# Altium PCB BMS PCB.PcbDoc (part 1 of 2)
Units mil, origin at the board's own origin, x right, y up, seen from the top; angles counter-clockwise.
Board outline 2280 x 3625.91 mil, 4 copper layers (TOP, L2, L3, BOTTOM), stack 62.449 mil thick; 104 components, 71 nets, 301 pads, 582 vias.
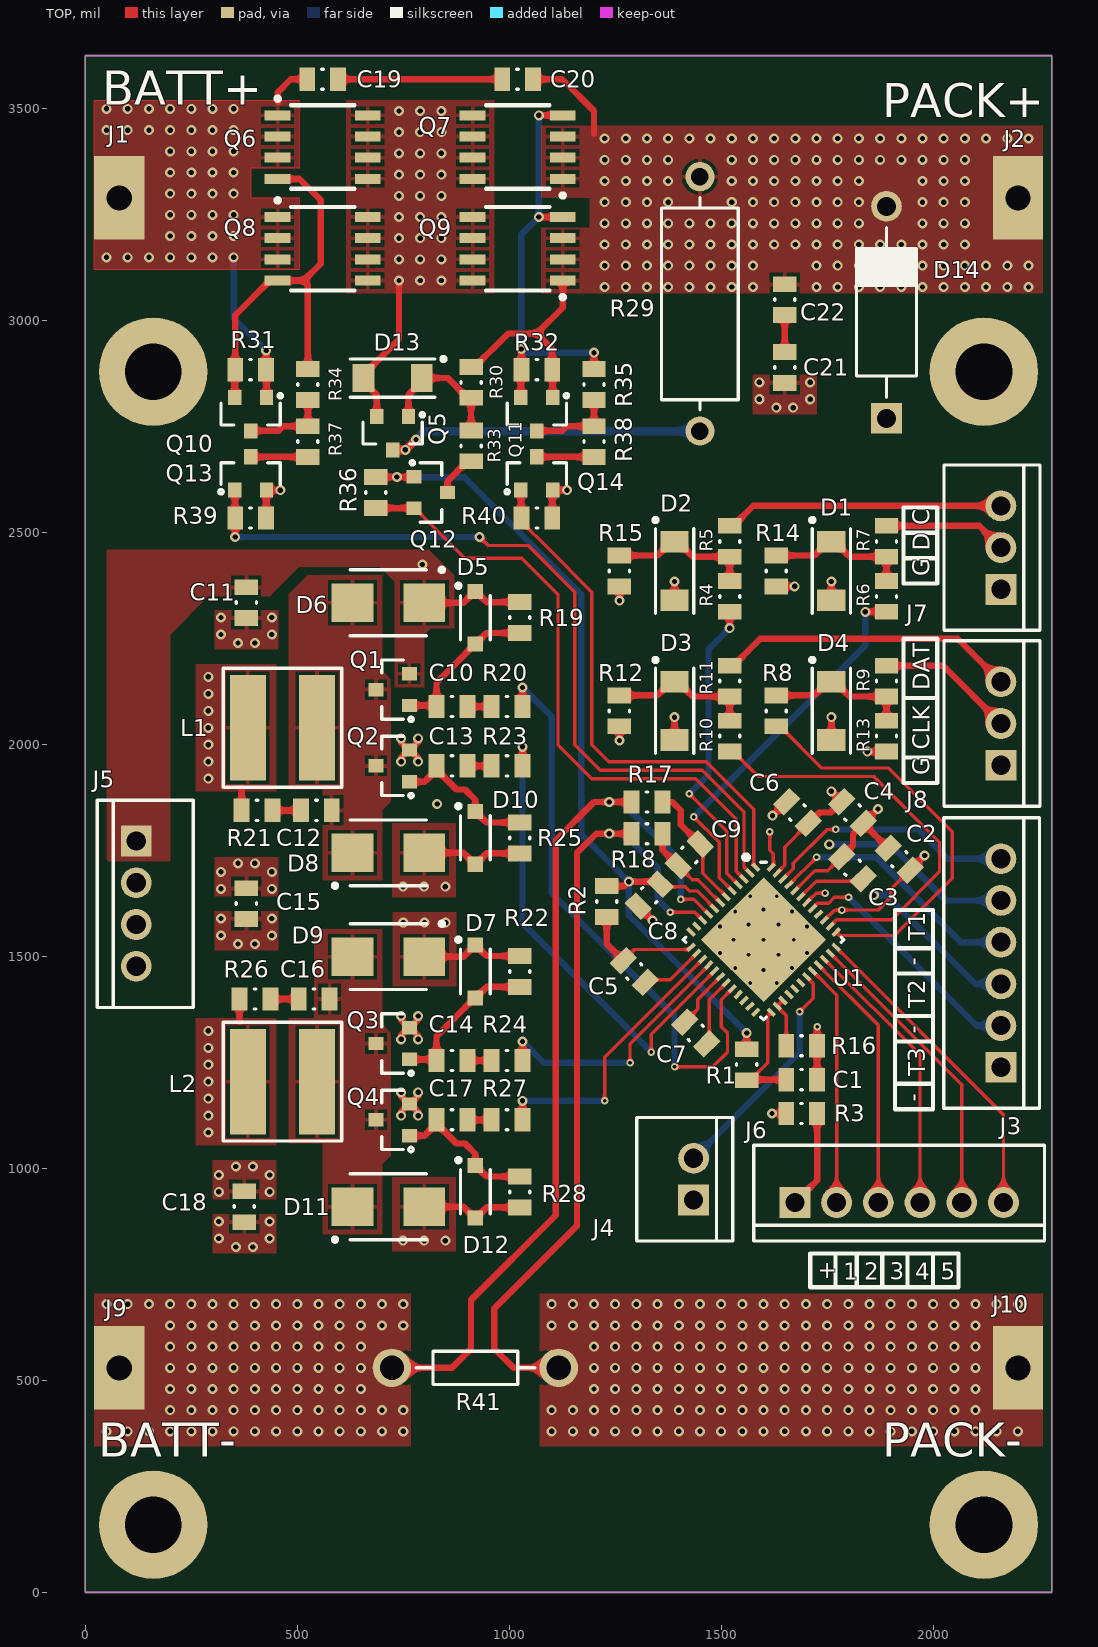
[diagram p0: TOP view]
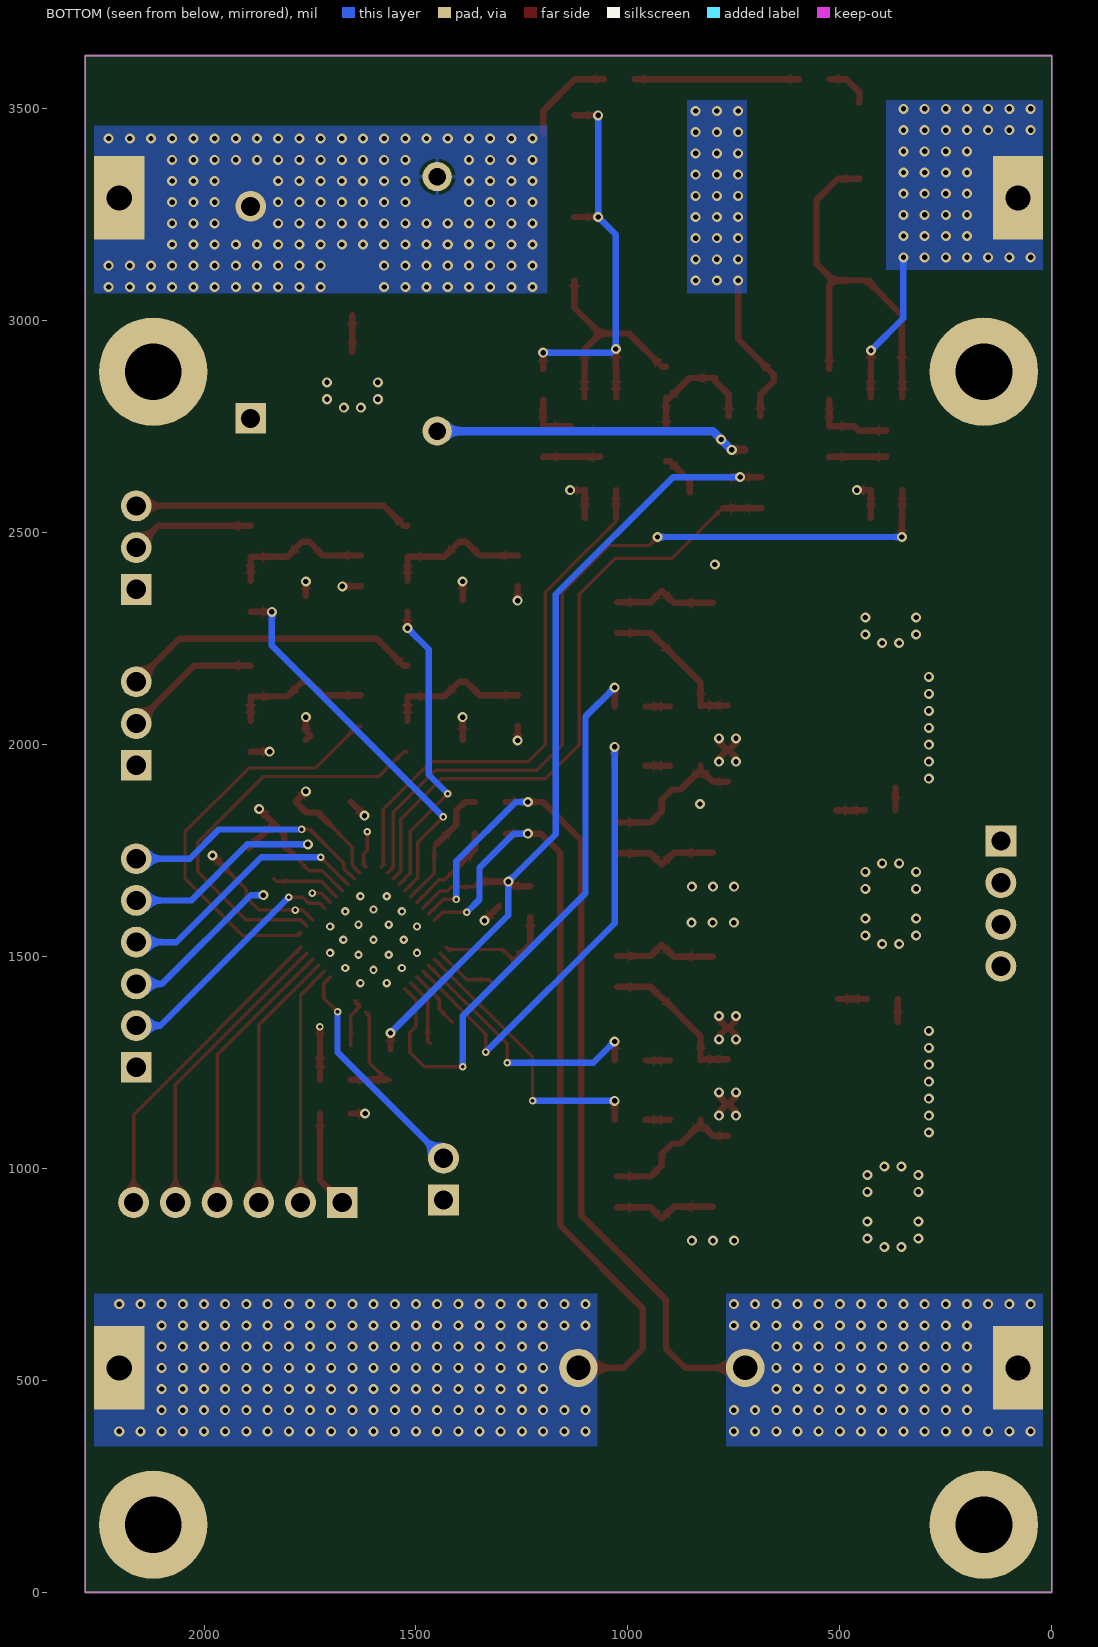
[diagram p1: BOTTOM view, seen from below]
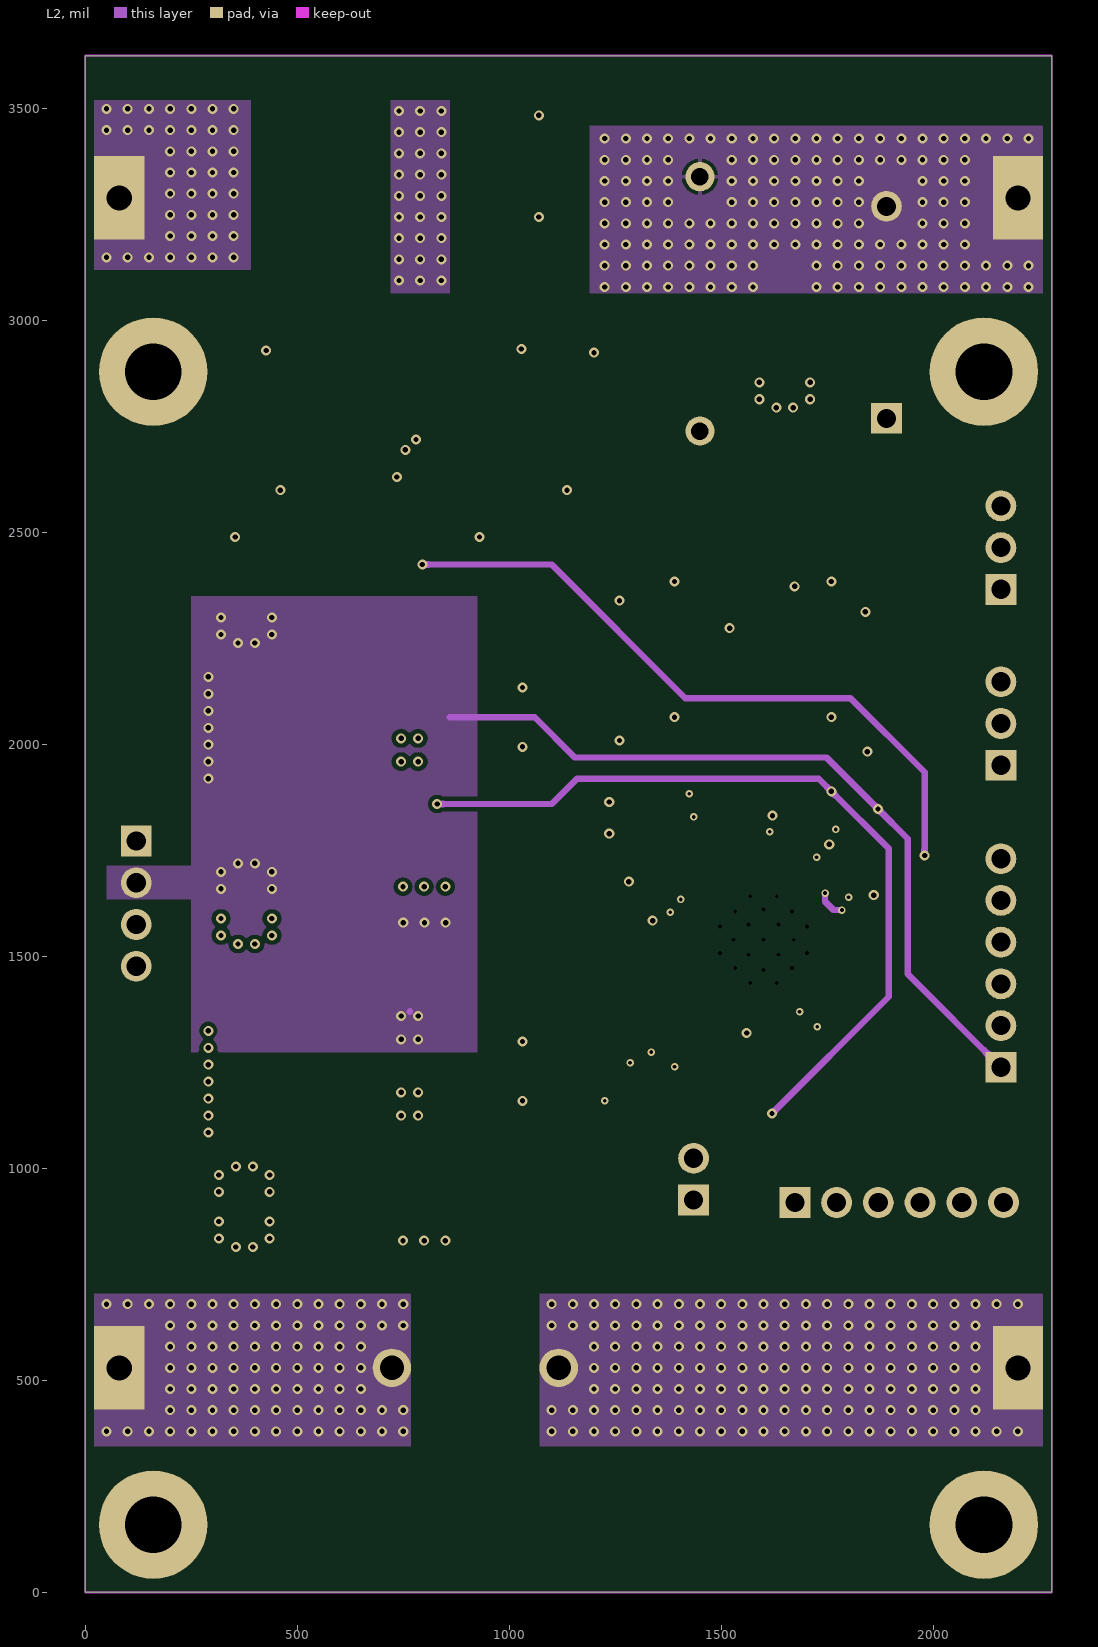
[diagram p2: L2]
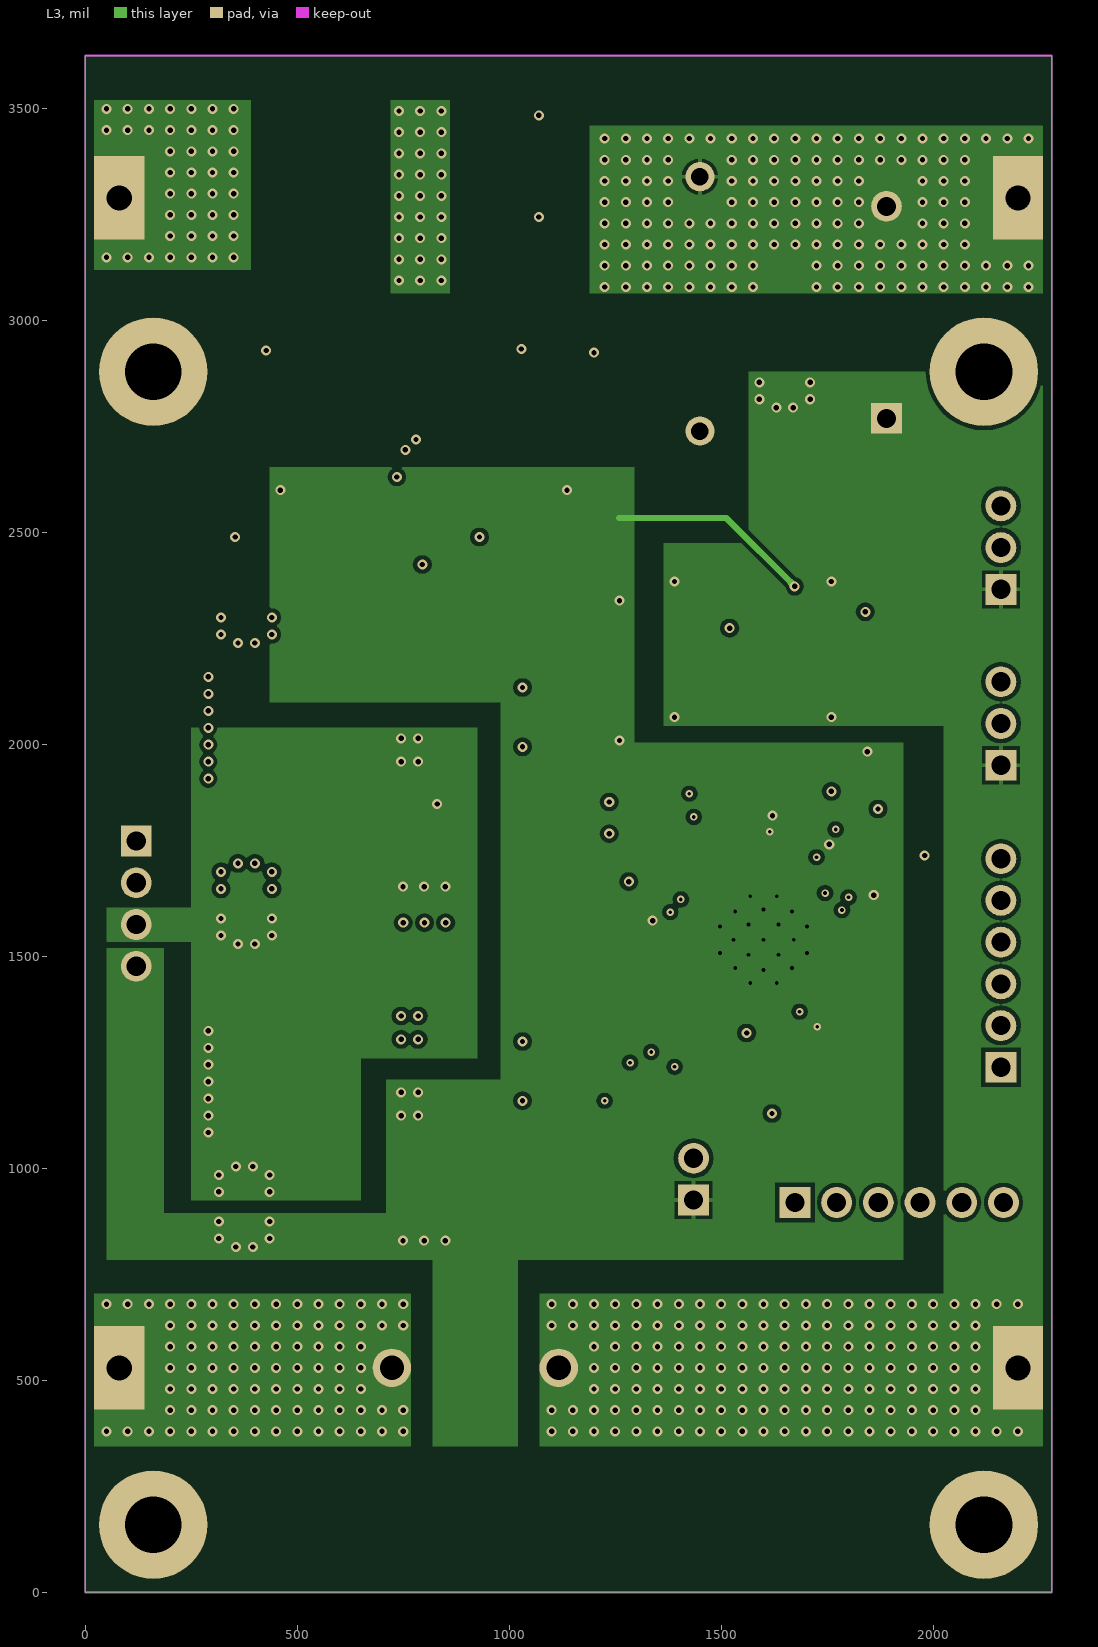
[diagram p3: L3]
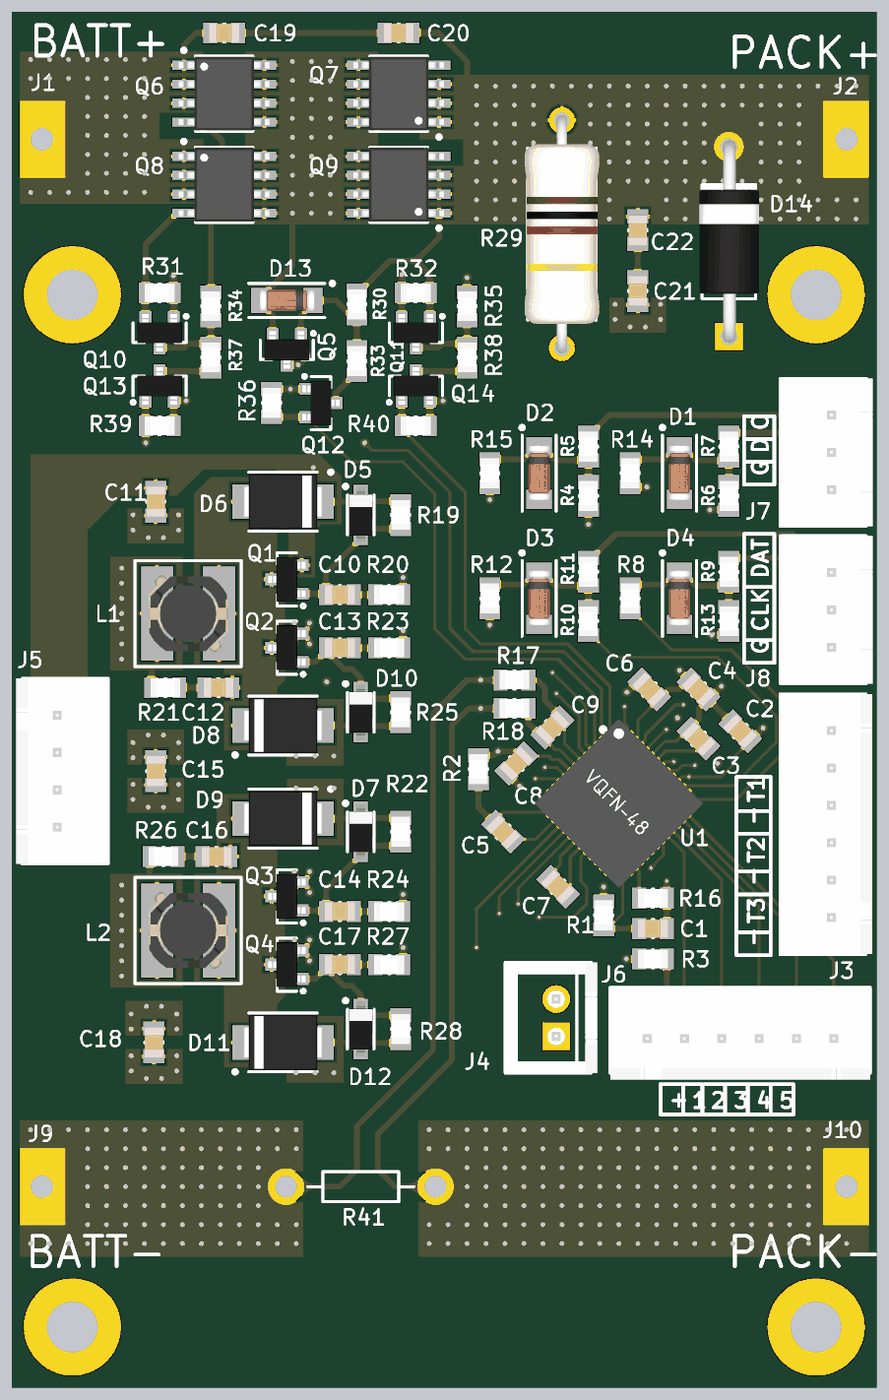
[diagram p4: 3D render of the assembled board from above, using the file's embedded part models]

## Layer stack, top to bottom
Top Solder: solder mask 1, SM-001, Dk 4
TOP: signal copper 1.378
Dielectric 2: prepreg 8.2835, PP-006, Dk 4.1
L2: signal copper 0.5984
Dielectric 1: core 41.9291, Core-043, Dk 4.3
L3: signal copper 0.5984
Dielectric 3: prepreg 8.2835, PP-006, Dk 4.1
BOTTOM: signal copper 1.378
Bottom Solder: solder mask 1, SM-001, Dk 4

## Board outline
0,0 0,3625.91 2280,3625.91 2280,0

## Design rules (kind name [scope] priority, off if disabled: settings)
BoardOutlineClearance [All] p1: gap=11.81 ignorepadtopadclearanceinfootprint=FALSE
Clearance [All] p1: gap=10 ignorepadtopadclearanceinfootprint=FALSE except(0: Arc-Hole Track-Hole SMDPad-Hole THPad-Hole Via-Hole Fill-Hole Poly-Hole Region-Hole Text-Hole; 5: Arc-Arc Arc-Track Track-Track SMDPad-SMDPad; 7.87: Arc-SMDPad Track-SMDPad; 12.99: Arc-THPad Track-THPad; 19.68: THPad-THPad)
HoleSize [All] p1: absolutevalues=TRUE maxlimit=248.03 minlimit=7.87 maxpercent=80.000 minpercent=20.000
MinimumAnnularRing [IsPad] p1: minimumring=11.81
MinimumSolderMaskSliver [All] p1: minsoldermaskwidth=2.76
PlaneConnect [IsPad] p1: planeconnectstyle=Relief reliefexpansion=20 reliefentries=4 reliefconductorwidth=10 reliefairgap=10
PolygonConnect PolygonConnect_Direct [InComponent('J1','J2','J5','J9','J10','R41','D14')] p1: connectstyle=Direct reliefconductorwidth=10 reliefentries=4 polygonreliefangle="90 Angle" airgapwidth=10
PolygonConnect [All] p2: thpad.connectstyle=Relief thpad.reliefconductorwidth=10 thpad.reliefentries=4 thpad.polygonreliefangle="90 Angle" thpad.airgapwidth=8 smdpad.connectstyle=Relief smdpad.reliefconductorwidth=10 smdpad.reliefentries=4 smdpad.polygonreliefangle="90 Angle" smdpad.airgapwidth=8 via.connectstyle=Direct via.reliefconductorwidth=10 via.reliefentries=4 via.polygonreliefangle="90 Angle" via.airgapwidth=8
RoutingVias [All] p1: holewidth=15.75 width=27.56 viastyle="Through Hole" minholewidth=7.87 minwidth=15.75 maxholewidth=19.68 maxwidth=31.5
SilkToSilkClearance [All] p1: silktosilkclearance=0
SilkToSolderMaskClearance [IsPad] p1: minsilkscreentomaskgap=6 clearancetoexposedcopper=TRUE
SolderMaskExpansion SolderMaskExpansion_Vias [IsVia] p1: expansion=4 istentingtop=TRUE
SolderMaskExpansion [All] p2: expansion=2.76 istentingtop=FALSE
UnRoutedNet [All] p1: checkbadconnections=TRUE
Width [All] p1: maxlimit=50 minlimit=5 preferedwidth=10
24 further rules are at their usual default settings.

## Classes and differential pairs
net class BATTVoltage: V1 V2 V3
net class FETControl: CHG DSG PRE
net class PUMPSignal: P1N P2N P2S P3S
component class Page3: C19 C20 C21 C22 D13 D14 Q5 Q6 Q7 Q8 Q9 Q10 Q11 Q12 Q13 Q14 R29 R30 R31 R32 R33 R34 R35 R36 R37 R38 R39 R40
component class Page2: C1 C2 C3 C4 C5 C6 C7 C8 C9 D1 D2 D3 D4 R1 R2 R3 R4 R5 R6 R7 R8 R9 R10 R11 R12 R13 R14 R15 R16 R17 R18
component class Page4: C10 C11 C12 C13 C14 C15 C16 C17 C18 D5 D6 D7 D8 D9 D10 D11 D12 L1 L2 Q1 Q2 Q3 Q4 R19 R20 R21 R22 R23 R24 R25 R26 R27 R28
component class "BMS Schematic": J1 J2 J3 J4 J5 J6 J7 J8 J9 J10 R41

## Components (designator, comment, footprint, x,y, rotation, side; value= is the part's Value field where it differs from the comment)
C1 "1uF" C0805 1690,1210 r0 top
C2 "10uF" C0805 1920,1730 r135 top
C3 "10uF" C0805 1810,1710 r135 top
C4 "10uF" C0805 1810,1840 r135 top
C5 "1000pF" C0805 1295,1465 r135 top
C6 "10uF" C0805 1680,1840 r135 top
C7 "1000pF" C0805 1440,1320 r315 top
C8 "10uF" C0805 1330,1645 r225 top
C9 "0.01uF" C0805 1425,1740 r225 top
C10 "3300pF" C0805 865,2090 r180 top
C11 "10uF" C0805 380,2335 r270 top
C12 "0.01uF" C0805 545,1845 r180 top
C13 "3300pF" C0805 865,1950 r180 top
C14 "3300pF" C0805 865,1255 r0 top
C15 "10uF" C0805 380,1625 r270 top
C16 "0.01uF" C0805 540,1400 r0 top
C17 "3300pF" C0805 865,1115 r0 top
C18 "10uF" C0805 375,910 r270 top
C19 "0.1uF" C0805 560,3570 r0 top
C20 "0.1uF" C0805 1020,3570 r0 top
C21 "0.1uF" C0805 1650,2890 r270 top
C22 "0.1uF" C0805 1650,3050 r270 top
D1 "5V6" MINIMELF 1760,2410 r90 top
D2 "5V6" MINIMELF 1390,2410 r90 top
D3 "5V6" MINIMELF 1390,2080 r90 top
D4 "5V6" MINIMELF 1760,2080 r90 top
D5 "1N5819" SOD123 920,2300 r90 top
D6 "SS34" DO-214AA-SMB 715,2335 r0 top
D7 "1N5819" SOD123 920,1465 r90 top
D8 "SS34" DO-214AA-SMB 715,1745 r180 top
D9 "SS34" DO-214AA-SMB 715,1500 r0 top
D10 "1N5819" SOD123 920,1780 r90 top
D11 "SS34" DO-214AA-SMB 715,910 r180 top
D12 "1N5819" SOD123 920,945 r90 top
D13 "5V6" MINIMELF 725,2865 r0 top
D14 "P6KE18A" DO-15 1890,3020 r90 top
J1 "PAD 5X3MM" "PAD 5X3MM" 80,3290 r90 top locked
J2 "PAD 5X3MM" "PAD 5X3MM" 2200,3290 r90 top locked
J3 "CON XH 6P" "XH 2.5 6P" 2160,1485 r270 top locked
J4 "CON XH 2P" "XH 2.5 2P" 1435,975 r270 top locked
J5 "CON XH 4P" "XH 2.5 4P" 120,1625 r90 top locked
J6 "CON XH 6P" "XH 2.5 6P" 1920,920 r180 top locked
J7 "CON XH 3P" "XH 2.5 3P" 2160,2465 r270 top locked
J8 "CON XH 3P" "XH 2.5 3P" 2160,2050 r270 top locked
J9 "PAD 5X3MM" "PAD 5X3MM" 80,530 r270 top locked
J10 "PAD 5X3MM" "PAD 5X3MM" 2200,530 r270 top locked
L1 "6.8uH" CDRH5D28R 465,2040 r180 top
L2 "6.8uH" CDRH5D28R 465,1205 r0 top
Q1 "AO3401" SOT-23 725,2130 r90 top
Q2 "AO3400" SOT-23 725,1950 r90 top
Q3 "AO3401" SOT-23 725,1295 r90 top
Q4 "AO3400" SOT-23 725,1115 r90 top
Q5 "AO3400" SOT-23 725,2735 r180 top
Q6 "AO4407" SOIC-8 560,3410 r0 top locked
Q7 "AO4407" SOIC-8 1020,3410 r180 top locked
Q8 "AO4407" SOIC-8 560,3170 r0 top locked
Q9 "AO4407" SOIC-8 1020,3170 r180 top locked
Q10 "MMBF4393L" SOT-23 390,2780 r180 top
Q11 "MMBF4393L" SOT-23 1065,2780 r180 top
Q12 "AO3400" SOT-23 815,2595 r270 top
Q13 "AO3400" SOT-23 390,2640 r0 top
Q14 "AO3400" SOT-23 1065,2640 r0 top
R1 "10K" R0805 1560,1245 r90 top
R2 "100K" R0805 1230,1630 r90 top
R3 "100" R0805 1690,1130 r0 top
R4 "100" R0805 1520,2350 r90 top
R5 "100" R0805 1520,2480 r90 top
R6 "100" R0805 1890,2350 r90 top
R7 "100" R0805 1890,2480 r90 top
R8 "100" R0805 1630,2080 r90 top
R9 "100" R0805 1890,2150 r90 top
R10 "100" R0805 1520,2020 r90 top
R11 "100" R0805 1520,2150 r90 top
R12 "1M" R0805 1260,2080 r90 top
R13 "1M" R0805 1890,2020 r90 top
R14 "1M" R0805 1630,2410 r90 top
R15 "1M" R0805 1260,2410 r90 top
R16 "1M" R0805 1690,1290 r180 top
R17 "4K7" R0805 1325,1865 r0 top
R18 "4K7" R0805 1325,1790 r0 top
R19 "22K" R0805 1025,2300 r90 top
R20 "120" R0805 995,2090 r180 top
R21 "120" R0805 405,1845 r180 top
R22 "22K" R0805 1025,1465 r90 top
R23 "120" R0805 995,1950 r180 top
R24 "120" R0805 995,1255 r0 top
R25 "22K" R0805 1025,1780 r90 top
R26 "120" R0805 400,1400 r0 top
R27 "120" R0805 995,1115 r0 top
R28 "22K" R0805 1025,945 r90 top
R29 "120" "RES TH 1W" 1450,3040 r90 top
R30 "1M" R0805 910,2855 r90 top
R31 "680K" R0805 390,2885 r0 top
R32 "680K" R0805 1065,2885 r180 top
R33 "680K" R0805 910,2705 r90 top
R34 "270K" R0805 525,2850 r90 top
R35 "270K" R0805 1200,2850 r90 top
R36 "1M" R0805 685,2595 r90 top
R37 "220K" R0805 525,2715 r90 top
R38 "220K" R0805 1200,2715 r90 top
R39 "1M" R0805 390,2535 r180 top
R40 "1M" R0805 1065,2535 r180 top
R41 "0.01" RSHUNT 920,530 r0 top locked
U1 "BQ78PL116" VQFN-48 1600,1540 r315 top locked

## Footprints (in the part's own frame and the unit in brackets; to place one, negate y for a bottom-side part, rotate by r counter-clockwise, add the part's x,y. Pads: shape width x height; smd on the part's side, far side on the other; paste and mask are expansions set on the pad)
C0805 [mm]
  rect 0.95x1.4 smd: 1(-0.925,0) 2(0.925,0)
  silkscreen extent -0.05,-0.6 0.05,0.6, body extent -1,-0.62 1,0.62, height 0.61
CDRH5D28R [mm]
  rect 2.15x6.3 smd: 1(-2.075,0) 2(2.075,0)
  silkscreen extent -3.56,-3.56 3.56,3.56, body extent -2.65,-2.58 2.65,2.6, height 2.81
DO-15 [mil]
  rect 72.4x72.4 hole 44.84: 1(-250,0)
  round 72.4 hole 44.84: 2(250,0)
  silkscreen extent -200,-71 200,71, body extent -267,-80 267,77, height 161
DO-214AA-SMB [mm]
  rect 2.5x2.3 smd: 1(-2.15,0) 2(2.15,0)
  silkscreen extent -2.29,-1.97 3.33,2.09, body extent -2.65,-1.85 2.65,1.85, height 2.26
MINIMELF [mm]
  rect 1.3x1.7 smd: 1(-1.75,0) 2(1.75,0)
  silkscreen extent -2.54,-1.14 3.17,1.27, body extent -1.82,-0.8 1.88,0.8, height 1.6
"PAD 5X3MM" [mm]
  rect 5x3 hole 1.5: 1(0,0)
R0805 [mm]
  rect 0.95x1.4 smd: 1(-0.925,0) 2(0.925,0)
  silkscreen extent -0.05,-0.6 0.05,0.6, body extent -1,-0.62 1,0.63, height 0.61
"RES TH 1W" [mm]
  round 1.75 hole 1.05: 1(-7.62,0) 2(7.62,0)
  silkscreen extent -6.35,-2.3 6.35,2.3, body extent -7.97,-2.5 7.97,2.5, height 5
RSHUNT [mm]
  round 2.3 hole 1.45: 1(-5,0) 2(5,0)
  silkscreen extent -3.56,-1 3.56,1
SOD123 [mm] "SODFL, 2-Leads, Body 1,55x3,70mm, IPC Medium Density"
  rect 0.9x0.95 smd: 1(-1.575,0) 2(1.575,0)
  silkscreen extent -1.33,-0.89 2.03,1.14, body extent -1.85,-0.8 1.85,0.8, height 1.28
SOIC-8 [mm]
  rect 1.55x0.6 smd: 1(-2.7,1.905) 2(-2.7,0.635) 3(-2.7,-0.635) 4(-2.7,-1.905) 5(2.7,-1.905) 6(2.7,-0.635) 7(2.7,0.635) 8(2.7,1.905)
  silkscreen extent -2.82,-2.5 1.91,3.02, body extent -3.03,-2.48 3.03,2.47, height 1.74
SOT-23 [mm]
  rect 0.8x0.9 smd: 1(-0.95,-1) 2(0.95,-1) 3(0,1)
  silkscreen extent -1.9,-1.23 1.78,0.65, body extent -1.5,-1.25 1.5,1.25, height 1.01
VQFN-48 [mm]
  rect 0.6x0.24 smd: 1(-3.4,2.75) 2(-3.4,2.25) 3(-3.4,1.75) 4(-3.4,1.25) 5(-3.4,0.75) 6(-3.4,0.25) 7(-3.4,-0.25) 8(-3.4,-0.75) 9(-3.4,-1.25) 10(-3.4,-1.75) 11(-3.4,-2.25) 12(-3.4,-2.75) 25(3.4,-2.75) 26(3.4,-2.25) 27(3.4,-1.75) 28(3.4,-1.25) 29(3.4,-0.75) 30(3.4,-0.25) 31(3.4,0.25) 32(3.4,0.75) 33(3.4,1.25) 34(3.4,1.75) 35(3.4,2.25) 36(3.4,2.75)
  rect 0.24x0.6 smd: 13(-2.75,-3.4) 14(-2.25,-3.4) 15(-1.75,-3.4) 16(-1.25,-3.4) 17(-0.75,-3.4) 18(-0.25,-3.4) 19(0.25,-3.4) 20(0.75,-3.4) 21(1.25,-3.4) 22(1.75,-3.4) 23(2.25,-3.4) 24(2.75,-3.4) 37(2.75,3.4) 38(2.25,3.4) 39(1.75,3.4) 40(1.25,3.4) 41(0.75,3.4) 42(0.25,3.4) 43(-0.25,3.4) 44(-0.75,3.4) 45(-1.25,3.4) 46(-1.75,3.4) 47(-2.25,3.4) 48(-2.75,3.4)
  rect 5.3x5.3 smd paste-2.65: 49(0,0)
  silkscreen extent -4.38,-3.4 3.4,3.4, body extent -4.05,-4.05 4.05,4.05, height 0.8
"XH 2.5 2P" [mm]
  rect 1.85x1.85 hole 1.15: 1(1.25,0)
  round 1.85 hole 1.15: 2(-1.25,0)
  silkscreen extent -3.7,-3.41 3.7,2.34, body extent -3.7,-3.36 3.7,2.74, height 2.9
"XH 2.5 3P" [mm]
  rect 1.85x1.85 hole 1.15: 1(2.5,0)
  round 1.85 hole 1.15: 2(0,0) 3(-2.5,0)
  silkscreen extent -4.95,-3.41 4.95,2.34, body extent -4.95,-3.33 4.95,2.77, height 7.01
"XH 2.5 4P" [mm]
  rect 1.85x1.85 hole 1.15: 1(3.75,0)
  round 1.85 hole 1.15: 2(1.25,0) 3(-1.25,0) 4(-3.75,0)
  silkscreen extent -6.22,-3.41 6.2,2.34, body extent -6.2,-3.36 6.2,2.74, height 7.01
"XH 2.5 6P" [mm]
  rect 1.85x1.85 hole 1.15: 1(6.25,0)
  round 1.85 hole 1.15: 2(3.75,0) 3(1.25,0) 4(-1.25,0) 5(-3.75,0) 6(-6.25,0)
  silkscreen extent -8.71,-3.43 8.71,2.31, body extent -8.71,-3.35 8.69,2.75, height 7.01

## Part data
C1: library part "CAP 0805 1uF", "0805 C 1uF Ceramic Multilayer Capacitor; 50 V; +125degC; X7R Dielectric; +/-10%", Case Code (Imperial)=0805, Case Code (Metric)=2012, Dielectric=X7R, Dielectric Material=Ceramic, Manufacturer=KEMET, Manufacturer Part Number=C0805C105K5RACTU, Max Operating Temperature=125°C, Min Operating Temperature=-55°C, Package Quantity=1, Tolerance=10%, Voltage=50V, Capacitance=1uF, Case/Package=0805, Category="Ceramic Capacitors", ComponentLink1Description=https://datasheet.ciiva.com/7842/1732744-7842192.pdf?src-supplier=Element14, ComponentLink1URL=https://datasheet.ciiva.com/7842/1732744-7842192.pdf?src-supplier=Element14, ComponentLink2Description=https://datasheet.ciiva.com/5408/kem-c1002-x7r-smd-5408569.pdf?src-supplier=Mouser, ComponentLink2URL=https://datasheet.ciiva.com/5408/kem-c1002-x7r-smd-5408569.pdf?src-supplier=Mouser, ComponentLink3Description=https://datasheet.ciiva.com/22700/1851736-22700523.pdf?src-supplier=Element14, ComponentLink3URL=https://datasheet.ciiva.com/22700/1851736-22700523.pdf?src-supplier=Element14, Construction=Flat, Contact Plating=Tin,Matte, Depth=1.25mm, Height=1.25mm, Length=2mm, Mount="Surface Mount,PCB", Packaging="Tape and Reel", Pricing 1="2500=0,25080, 10000=0,22150 (USD)", REACH SVHC="No SVHC", RoHS=Yes, RoHS Compliant=Yes, Series=C, Stock 1=317103, Supplier 1="Arrow Electronics", Supplier Part Number 1=C0805C105K5RACTU, Termination=SMD/SMT, Thickness=0.055inch, Voltage Rating=50V, Voltage Rating (DC)=50V, Width=0.049inch
C2 C3 C4 C6 C8 C11 C15 C18: library part "CAP 0805 10uF", "Cap Ceramic 10uF 10V X5R 10% SMD 0805 85C Plastic T/R", Case Code (Imperial)=0805, Case Code (Metric)=2012, Dielectric=X5R, Manufacturer=KEMET, Manufacturer Part Number=C0805L106K8PACTU, Max Operating Temperature=85°C, Min Operating Temperature=-55°C, Package Quantity=4000, Supplier Part Number 1=80-C0805L106K8P, Tolerance=10%, Voltage Rating=10V, Capacitance=10uF, Case/Package=0805, Category="Ceramic Capacitors", ComponentLink1Description=https://datasheet.ciiva.com/23928/1751297-23928886.pdf?src-supplier=Newark, ComponentLink1URL=https://datasheet.ciiva.com/23928/1751297-23928886.pdf?src-supplier=Newark, ComponentLink2Description=https://datasheet.ciiva.com/232/mlcclowprofile-232272.pdf?src-supplier=Digi-Key, ComponentLink2URL=https://datasheet.ciiva.com/232/mlcclowprofile-232272.pdf?src-supplier=Digi-Key, ComponentLink3Description=https://datasheet.ciiva.com/193/mlcclowprofile-193796.pdf?src-supplier=Digi-Key, ComponentLink3URL=https://datasheet.ciiva.com/193/mlcclowprofile-193796.pdf?src-supplier=Digi-Key, ComponentLink4Description=https://datasheet.ciiva.com/232/mlcclowprofile-232271.pdf?src-supplier=Digi-Key, ComponentLink4URL=https://datasheet.ciiva.com/232/mlcclowprofile-232271.pdf?src-supplier=Digi-Key, Depth=1.25mm, Length=0.079inch, Mount="Surface Mount", Packaging="Tape and Reel", Pricing 1="1=0,73000, 10=0,54000, 50=0,54000, 100=0,37000, 1000=0,24700, 10000=0,21500 (USD)", REACH SVHC="No SVHC", RoHS=Yes, RoHS Compliant=Yes, Series=C, Stock 1=15642, Supplier 1=Mouser, Termination=SMD/SMT, Thickness=0.037inch, Voltage Rating (DC)=10V, Width=0.049inch
C5 C7: library part "CAP 0805 1000pF", "Cap Ceramic 0.001uF 50V X7R 10% SMD 0805 125C Plastic T/R", Capacitance=1nF, Case Code (Imperial)=0805, Case Code (Metric)=2012, Dielectric=X7R, Dielectric Material=Ceramic, Manufacturer=KEMET, Manufacturer Part Number=C0805C102K5RACTU, Max Operating Temperature=125°C, Min Operating Temperature=-55°C, Package Quantity=4000, Tolerance=10%, Voltage=50V, Case/Package=0805, Category="Ceramic Capacitors", ComponentLink1Description=https://datasheet.ciiva.com/7842/1918693-7842527.pdf?src-supplier=Element14, ComponentLink1URL=https://datasheet.ciiva.com/7842/1918693-7842527.pdf?src-supplier=Element14, ComponentLink2Description=https://datasheet.ciiva.com/18193/getdatasheetpartid-385640-18193338.pdf?src-supplier=Verical, ComponentLink2URL=https://datasheet.ciiva.com/18193/getdatasheetpartid-385640-18193338.pdf?src-supplier=Verical, ComponentLink3Description=https://datasheet.ciiva.com/39122/docfinderpartnumberc0402c102k5ractu-39122922.pdf?src-supplier=Onlinecomponents.com, ComponentLink3URL=https://datasheet.ciiva.com/39122/docfinderpartnumberc0402c102k5ractu-39122922.pdf?src-supplier=Onlinecomponents.com, Construction=Flat, Contact Plating=Tin,Matte, Depth=1.25mm, Height=0.78mm, Lead Pitch=0.75mm, Length=2mm, Mount="Surface Mount,PCB", Number of Pins=2, Packaging="Tape and Reel", Pricing 1="4000=0,03830 (USD)", Radiation Hardening=No, REACH SVHC="No SVHC", RoHS=Yes, RoHS Compliant=Yes, Series="SMD Comm X7R", Stock 1=255800, Supplier 1="Arrow Electronics", Supplier Part Number 1=C0805C102K5RACTU, Termination=SMD/SMT, Voltage Rating=50V, Voltage Rating (DC)=50V, Width=1.25mm
C9 C12 C16: library part "CAP 0805 0.01uF", "Cap Ceramic 0.01uF 16V X7R 10% SMD 0805 125°C Paper T/R", Capacitance=10nF, Case Code (Imperial)=0805, Case Code (Metric)=2012, Dielectric=X7R, Dielectric Material=Ceramic, Manufacturer=KEMET, Manufacturer Part Number=C0805C103K4RACTU, Max Operating Temperature=125°C, Min Operating Temperature=-55°C, Package Quantity=1, Tolerance=10%, Voltage Rating=16V, Case/Package=0805, Category="Ceramic Capacitors", ComponentLink1Description=http://www.farnell.com/datasheets/2746090.pdf?src-supplier=Farnell, ComponentLink1URL=http://www.farnell.com/datasheets/2746090.pdf?src-supplier=Farnell, ComponentLink2Description=http://www.mouser.com/ds/2/212/KEM_C1002_X7R_SMD-1102033.pdf?src-supplier=Mouser, ComponentLink2URL=http://www.mouser.com/ds/2/212/KEM_C1002_X7R_SMD-1102033.pdf?src-supplier=Mouser, ComponentLink3Description=https://api.kemet.com/component-edge/download/datasheet/C0805C103K4RACTU.pdf?src-supplier=Digi-Key, ComponentLink3URL=https://api.kemet.com/component-edge/download/datasheet/C0805C103K4RACTU.pdf?src-supplier=Digi-Key, ComponentLink4Description=http://www.farnell.com/datasheets/1791936.pdf?src-supplier=Newark, ComponentLink4URL=http://www.farnell.com/datasheets/1791936.pdf?src-supplier=Newark, ComponentLink5Description=http://www.farnell.com/datasheets/2746090.pdf?src-supplier=Newark, ComponentLink5URL=http://www.farnell.com/datasheets/2746090.pdf?src-supplier=Newark, ComponentLink6Description=http://www.farnell.com/datasheets/2064983.pdf?src-supplier=Element14, ComponentLink6URL=http://www.farnell.com/datasheets/2064983.pdf?src-supplier=Element14, ComponentLink7Description=http://components.arrow.com/part/dataview/3450723S5469568N7429?src-supplier=Arrow+Electronics, ComponentLink7URL=http://components.arrow.com/part/dataview/3450723S5469568N7429?src-supplier=Arrow+Electronics, Depth=1.25mm, Height=0.78mm, Lead Pitch=0.75mm, Length=2mm, Mount="Surface Mount", Packaging="Tape and Reel", Pricing 1="4000=0,07000, 8000=0,06640, 12000=0,06580, 20000=0,06310, 24000=0,05650, 100000=0,04830 (USD)", Radiation Hardening=No, REACH SVHC="No SVHC", RoHS=Yes, Stock 1=24000, Supplier 1="Arrow Electronics", Supplier Part Number 1=C0805C103K4RACTU, Termination=SMD/SMT, Thickness=0.035inch, Voltage Rating (DC)=16V, Width=0.049inch
C10 C13 C14 C17: library part "CAP 0805 3300pF", "Cap Ceramic 0.0033uF 50V X7R 10% SMD 0805 125C Paper T/R", Capacitance=3.3nF, Case Code (Imperial)=0805, Case Code (Metric)=2012, Dielectric=X7R, Dielectric Material=Ceramic, Manufacturer=KEMET, Manufacturer Part Number=C0805C332K5RACTU, Max Operating Temperature=125°C, Min Operating Temperature=-55°C, Package Quantity=1, Tolerance=10%, Voltage=50V, Case/Package=0805, Category="Ceramic Capacitors", ComponentLink1Description=https://datasheet.ciiva.com/7842/kem-c1002-x7r-smd-7842598.pdf?src-supplier=Element14, ComponentLink1URL=https://datasheet.ciiva.com/7842/kem-c1002-x7r-smd-7842598.pdf?src-supplier=Element14, ComponentLink2Description=https://datasheet.ciiva.com/26948/getdatasheetpartid-385720-26948486.pdf?src-supplier=Verical, ComponentLink2URL=https://datasheet.ciiva.com/26948/getdatasheetpartid-385720-26948486.pdf?src-supplier=Verical, ComponentLink3Description=https://datasheet.ciiva.com/5415/kem-c1002-x7r-smd-357932-5415032.pdf?src-supplier=Mouser, ComponentLink3URL=https://datasheet.ciiva.com/5415/kem-c1002-x7r-smd-357932-5415032.pdf?src-supplier=Mouser, ComponentLink4Description=https://datasheet.ciiva.com/6126/kem-c1002-x7r-smd-6126698.pdf?src-supplier=Farnell, ComponentLink4URL=https://datasheet.ciiva.com/6126/kem-c1002-x7r-smd-6126698.pdf?src-supplier=Farnell, ComponentLink5Description=https://datasheet.ciiva.com/7842/1851736-7842314.pdf?src-supplier=Element14, ComponentLink5URL=https://datasheet.ciiva.com/7842/1851736-7842314.pdf?src-supplier=Element14, ComponentLink6Description=https://datasheet.ciiva.com/7842/1851736-7842315.pdf?src-supplier=Element14, ComponentLink6URL=https://datasheet.ciiva.com/7842/1851736-7842315.pdf?src-supplier=Element14, ComponentLink7Description=https://datasheet.ciiva.com/14589/70095383-14589486.pdf?src-supplier=Allied+Electronics, ComponentLink7URL=https://datasheet.ciiva.com/14589/70095383-14589486.pdf?src-supplier=Allied+Electronics, ComponentLink8Description=https://datasheet.ciiva.com/28688/1851736-28688671.pdf?src-supplier=Element14, ComponentLink8URL=https://datasheet.ciiva.com/28688/1851736-28688671.pdf?src-supplier=Element14, Construction=Flat, Contact Plating=Tin,Matte, Depth=1.25mm, Dissipation Factor=2.5%, Height=0.78mm, Lead Pitch=0.75mm, Length=2mm, Mount="Surface Mount", Number of Pins=2, Packaging="Tape and Reel", Pricing 1="4000=0,00790, 40000=0,00630 (USD)", Radiation Hardening=No, REACH SVHC="No SVHC", RoHS=Yes, RoHS Compliant=Yes, Series=C, Stock 1=104000, Supplier 1="Arrow Electronics", Supplier Part Number 1=C0805C332K5RACTU, Termination=SMD/SMT, Thickness=0.035inch, Voltage Rating=50V, Voltage Rating (DC)=50V, Width=0.049inch
C19 C20 C21 C22: library part "CAP 0805 0.1uF", "Cap Ceramic 0.1uF 50V X7R 10% SMD 0805 125°C Paper T/R", Capacitance=100nF, Case/Package=0805, Dielectric=X7R, Dielectric Material=Ceramic, Manufacturer=KEMET, Manufacturer Part Number=C0805C104K5RAC7411, Max Operating Temperature=125°C, Min Operating Temperature=-55°C, Supplier Part Number 1=80-C0805C104K5RACLR, Tolerance=10%, Voltage Rating (DC)=50V, Category="Ceramic Capacitors", ComponentLink1Description=http://components.arrow.com/part/dataview/30748302S8994022N7429?src-supplier=Arrow+Electronics, ComponentLink1URL=http://components.arrow.com/part/dataview/30748302S8994022N7429?src-supplier=Arrow+Electronics, ComponentLink2Description=https://www.verical.com/server-webapp/html/getDatasheet?partID=248513&src-supplier=Verical, ComponentLink2URL=https://www.verical.com/server-webapp/html/getDatasheet?partID=248513&src-supplier=Verical, Construction=Flat, Depth=1.25mm, Height=0.9mm, Length=2mm, Mount="Surface Mount", Packaging="Tape and Reel", Pricing 1="1=0,13000, 10=0,09300, 50=0,09300, 100=0,04400, 1000=0,02600, 10000=0,02100 (USD)", Radiation Hardening=No, RoHS=Yes, RoHS Compliant=Yes, Stock 1=1204859, Supplier 1=Mouser
D1 D2 D3 D4 D13: library part "ZENER 5V6", "Diode Zener Single 5.6V 7% 500mW Automotive 2-Pin Mini-MELF T/R", Case/Package=SOD, Manufacturer=Diotec, Manufacturer Part Number=ZMM5.6, Power Dissipation=500mW, Tolerance=5%, Zener Voltage=5.6V, Category="Zener Diodes", ComponentLink1Description=https://datasheet.ciiva.com/26309/rvzmm1-zmm75-data-e-26309545.pdf?src-supplier=Distrelec, ComponentLink1URL=https://datasheet.ciiva.com/26309/rvzmm1-zmm75-data-e-26309545.pdf?src-supplier=Distrelec, Pricing 1="1=0,10930, 10=0,02530 (USD)", RoHS=Yes, RoHS Compliant=Yes, Stock 1=11, Supplier 1="Arrow Electronics", Supplier Part Number 1=ZMM5.6
D5 D7 D10 D12: library part 1N5819HW-7-F, "VR=40V IF=1A 60pF P=450mW", Average Rectified Current=1A, Capacitance=110pF, Case/Package=SOD-123-2, Forward Voltage=450mV, Manufacturer=Diodes, Max Forward Surge Current (Ifsm)=25A, Max Operating Temperature=125°C, Max Power Dissipation=450mW, Max Repetitive Reverse Voltage (Vrrm)=40V, Max Reverse Current=50uA, Min Operating Temperature=-65°C, Package Quantity=3000, Supplier Part Number 1=7082197, Category="Schottky Diodes", ComponentLink1Description=https://datasheet.ciiva.com/27092/1538419-27092484.pdf?src-supplier=Jameco, ComponentLink1URL=https://datasheet.ciiva.com/27092/1538419-27092484.pdf?src-supplier=Jameco, ComponentLink2Description=https://datasheet.ciiva.com/16303/ds30217-16303296.pdf?src-supplier=Future+Electronics, ComponentLink2URL=https://datasheet.ciiva.com/16303/ds30217-16303296.pdf?src-supplier=Future+Electronics, ComponentLink3Description=https://datasheet.ciiva.com/1177/ds30217-1177089.pdf?src-supplier=Element14, ComponentLink3URL=https://datasheet.ciiva.com/1177/ds30217-1177089.pdf?src-supplier=Element14, ComponentLink4Description=https://datasheet.ciiva.com/8303/ds30217-8303132.pdf?src-supplier=Avnet, ComponentLink4URL=https://datasheet.ciiva.com/8303/ds30217-8303132.pdf?src-supplier=Avnet, ComponentLink5Description=https://datasheet.ciiva.com/912/ds30217-912802.pdf?src-supplier=Digi-Key, ComponentLink5URL=https://datasheet.ciiva.com/912/ds30217-912802.pdf?src-supplier=Digi-Key, ComponentLink6Description=https://datasheet.ciiva.com/912/ds30217-912803.pdf?src-supplier=Digi-Key, ComponentLink6URL=https://datasheet.ciiva.com/912/ds30217-912803.pdf?src-supplier=Digi-Key, ComponentLink7Description=https://datasheet.ciiva.com/912/ds30217-912801.pdf?src-supplier=Digi-Key, ComponentLink7URL=https://datasheet.ciiva.com/912/ds30217-912801.pdf?src-supplier=Digi-Key, Contact Plating=Tin,Matte, Current Rating=1A, Element Configuration=Single, Forward Current=1A, Height=1.25mm, Lead Free="Lead Free", Length=2.85mm, Manufacturer Part Number=1N5819HW-7-F, Max Reverse Voltage (DC)=40V, Number of Pins=2, Output Current=1A, Packaging="Tape and Reel", Peak Non-Repetitive Surge Current=25A, Polarity=Standard, Pricing 1="25=0,32800, 150=0,18600, 750=0,12400, 1500=0,09400 (GBP)", Radiation Hardening=No, REACH SVHC="No SVHC", RoHS=Yes, RoHS Compliant=Yes, Series=-, Stock 1=100, Supplier 1=RSComponents, Termination=SMD/SMT, Voltage Rating (DC)=40V, Weight=0.000353oz, Width=1.7mm
D6 D8 D9 D11: "Diode Schottky 3A 40V Smb", Manufacturer=Comchip, Manufacturer Part Number=SS34B-HF, Supplier Part Number 1=750-SS34B-HF, Pricing 1="1=0,44000, 10=0,29300, 50=0,29300, 100=0,17900, 1000=0,11900, 3000=0,10200, 9000=0,09500, 10000=0,09500, 24000=0,08700, 45000=0,08400, 99000=0,08100 (USD)", RoHS=No, Stock 1=18569, Supplier 1=Mouser
D14: "TVS DIODE 15.3VWM 32.5VC DO15", Breakdown Voltage=17.1V, Case/Package=DO-15, Clamping Voltage=25.2V, Leakage Current=1uA, Manufacturer=Littelfuse, Max Breakdown Voltage=18.9V, Max Operating Temperature=175°C, Max Power Dissipation=5W, Max Surge Current=24A, Min Operating Temperature=-55°C, Operating Supply Voltage=15.3V, Package Quantity=4000, Peak Pulse Current=24.2A, Peak Pulse Power=600W, Power Line Protection=No, Resistor Type=Zener, Test Current=1mA, Voltage Rating (DC)=18V, Category=Diodes, Clamping Voltage-Max=25.2V, ComponentLink1Description=https://datasheet.ciiva.com/16473/littelfuse-tvs-diode-p6ke-16473576.pdf?src-supplier=Future+Electronics, ComponentLink1URL=https://datasheet.ciiva.com/16473/littelfuse-tvs-diode-p6ke-16473576.pdf?src-supplier=Future+Electronics, ComponentLink2Description=https://datasheet.ciiva.com/331/littelfuse-tvs-diode-p6ke-datasheet-pdf-331022.pdf?src-supplier=Digi-Key, ComponentLink2URL=https://datasheet.ciiva.com/331/littelfuse-tvs-diode-p6ke-datasheet-pdf-331022.pdf?src-supplier=Digi-Key, ComponentLink3Description=https://datasheet.ciiva.com/331/littelfuse-tvs-diode-p6ke-datasheet-pdf-331021.pdf?src-supplier=Digi-Key, ComponentLink3URL=https://datasheet.ciiva.com/331/littelfuse-tvs-diode-p6ke-datasheet-pdf-331021.pdf?src-supplier=Digi-Key, Diameter=3.6mm, Diode Type=ZENER, Direction=Unidirectional, Lead Free="Lead Free", Length=7.6mm, Manufacturer Part Number=P6KE18A, Max Reverse Leakage Current=1uA, Min Breakdown Voltage=17.1V, Mount="Through Hole", Number of Channels=1, Number of Elements=1, Number of Pins=2, Number of Unidirectional Channels=1, Packaging="Tape and Reel", Polarity=Unidirectional, Power Dissipation=600W, Pricing 1="1=0,51800, 10=0,42000, 25=0,41460, 100=0,29520, 250=0,29500, 500=0,23600, 1000=0,17410 (USD)", REACH SVHC="No SVHC", Reverse Breakdown Voltage=17.1V, Reverse Standoff Voltage=15.3V, RoHS=Yes, RoHS Compliant=Yes, Series=P6KE, Stock 1=2982, Supplier 1="Arrow Electronics", Supplier Part Number 1=P6KE18A, Termination=Axial
J3 J6: library part "CONN XH 2.5 6P", "CONN HEADER VERT 6POS 2.5MM", Manufacturer=JST, Manufacturer Part Number=B6BXHA(LF)(SN), Supplier Part Number 1=14301998, Category="FFC / FPC", ComponentLink1Description=https://datasheet.ciiva.com/26894/getdatasheetpartid-424647-26894806.pdf?src-supplier=Verical, ComponentLink1URL=https://datasheet.ciiva.com/26894/getdatasheetpartid-424647-26894806.pdf?src-supplier=Verical, ComponentLink2Description=https://datasheet.ciiva.com/26894/getdatasheetpartid-641012-26894489.pdf?src-supplier=Verical, ComponentLink2URL=https://datasheet.ciiva.com/26894/getdatasheetpartid-641012-26894489.pdf?src-supplier=Verical, ComponentLink3Description=https://datasheet.ciiva.com/712/exh-712511.pdf?src-supplier=Digi-Key, ComponentLink3URL=https://datasheet.ciiva.com/712/exh-712511.pdf?src-supplier=Digi-Key, ComponentLink4Description=https://datasheet.ciiva.com/16397/b6b-xh-alfsn-16397116.pdf?src-supplier=Future+Electronics, ComponentLink4URL=https://datasheet.ciiva.com/16397/b6b-xh-alfsn-16397116.pdf?src-supplier=Future+Electronics, RoHS=Yes, Supplier 1=Distrelec
J4: library part "CONN XH 2.5 2P", "2 Position Dual Row 2.5 mm Pitch Through Hole Shrouded Header", Manufacturer=JST, Manufacturer Part Number=B2B-XH-A-GU, Supplier Part Number 1=455-2946-ND, Category="Headers and Wire Housings", ComponentLink1Description=https://datasheet.ciiva.com/16417/exh-16417678.pdf?src-supplier=Future+Electronics, ComponentLink1URL=https://datasheet.ciiva.com/16417/exh-16417678.pdf?src-supplier=Future+Electronics, Pricing 1="1=0,24000, 10=0,20400, 100=0,15680, 500=0,13270, 1000=0,10858, 5000=0,09652, 10000=0,08747 (USD)", RoHS=Yes, Stock 1=22513, Supplier 1=Digi-Key
J5: library part "CONN XH 2.5 4P", "XH Series 4 Position 2.5 mm Pitch Through Hole Crimp Top Entry Shrouded Header", Manufacturer=JST, Manufacturer Part Number=B4B-XH-A(LF)(SN), Supplier Part Number 1=8201551, Category="FFC / FPC", ComponentLink1Description=https://datasheet.ciiva.com/16203/b4b-xh-alfsn-16203642.pdf?src-supplier=Future+Electronics, ComponentLink1URL=https://datasheet.ciiva.com/16203/b4b-xh-alfsn-16203642.pdf?src-supplier=Future+Electronics, ComponentLink2Description=https://datasheet.ciiva.com/26924/getdatasheetpartid-640571-26924035.pdf?src-supplier=Verical, ComponentLink2URL=https://datasheet.ciiva.com/26924/getdatasheetpartid-640571-26924035.pdf?src-supplier=Verical, ComponentLink3Description=https://datasheet.ciiva.com/26894/getdatasheetpartid-455616-26894787.pdf?src-supplier=Verical, ComponentLink3URL=https://datasheet.ciiva.com/26894/getdatasheetpartid-455616-26894787.pdf?src-supplier=Verical, ComponentLink4Description=https://datasheet.ciiva.com/726/exh-726404.pdf?src-supplier=Digi-Key, ComponentLink4URL=https://datasheet.ciiva.com/726/exh-726404.pdf?src-supplier=Digi-Key, Pricing 1="5=0,42800, 125=0,15600, 500=0,14600, 1250=0,13600, 2500=0,12800 (GBP)", RoHS=Yes, Stock 1=10520, Supplier 1=RSComponents
J7 J8: library part "CONN XH 2.5 3P", "Connector Header, XH Series, 3 Position, 2.50mm, Through Hole, Press-Fit, Solder, Natural", Manufacturer=JST, Manufacturer Part Number=B3B-XH-A(LF)(SN), Supplier Part Number 1=1724888, Category="Headers and Wire Housings", ComponentLink1Description=https://datasheet.ciiva.com/26894/getdatasheetpartid-640434-26894454.pdf?src-supplier=Verical, ComponentLink1URL=https://datasheet.ciiva.com/26894/getdatasheetpartid-640434-26894454.pdf?src-supplier=Verical, ComponentLink2Description=https://datasheet.ciiva.com/26894/getdatasheetpartid-440399-26894778.pdf?src-supplier=Verical, ComponentLink2URL=https://datasheet.ciiva.com/26894/getdatasheetpartid-440399-26894778.pdf?src-supplier=Verical, ComponentLink3Description=https://datasheet.ciiva.com/11746/0900766b8082653f-11746520.pdf?src-supplier=RSComponents, ComponentLink3URL=https://datasheet.ciiva.com/11746/0900766b8082653f-11746520.pdf?src-supplier=RSComponents, Pricing 1="1000=0,07100 (GBP)", RoHS=Yes, Stock 1=43000, Supplier 1=RSComponents
L1 L2: library part CDRH5D28RHPNP-6R8NC, "Ind Power 6.8uH 25% Ferrite Drum Core T/R", Manufacturer=Sumida, Supplier Part Number 1=IND14645, Category=Inductors, Manufacturer Part Number=CDRH5D28RHPNP-6R8NC, Pricing 1="2000=0,41000, 4000=0,36900, 8000=0,36560, 12000=0,35530 (USD)", RoHS=Yes, RoHS Compliant=Yes, Stock 1=20000, Supplier 1=Rutronik
Q1 Q3: "Trans Mosfet P-ch 30V 4A 3-PIN SOT-23 T/r", Case/Package=TO-236-3, Continuous Drain Current (ID)=4A, Drain to Source Voltage (Vdss)=30V, Input Capacitance=1.2nF, Manufacturer="Alpha & Omega Semiconductor", Manufacturer Part Number=AO3401A, Max Operating Temperature=150°C, Max Power Dissipation=1.4W, Min Operating Temperature=-55°C, Supplier Part Number 1=C15127, Category=MOSFETs, ComponentLink1Description=https://datasheet.ciiva.com/940/ao3401a-940720.pdf?src-supplier=Digi-Key, ComponentLink1URL=https://datasheet.ciiva.com/940/ao3401a-940720.pdf?src-supplier=Digi-Key, ComponentLink2Description=https://datasheet.ciiva.com/26927/getdatasheetpartid-79048-26927888.pdf?src-supplier=Verical, ComponentLink2URL=https://datasheet.ciiva.com/26927/getdatasheetpartid-79048-26927888.pdf?src-supplier=Verical, Lead Free="Lead Free", Mount="Surface Mount", Number of Elements=1, Number of Pins=3, Packaging="Tape and Reel", Power Dissipation=1.4W, Pricing 1="5=0,13080, 50=0,10770, 150=0,09610, 500=0,08750, 2500=0,08060, 5000=0,07710 (USD)", Radiation Hardening=No, Rds On Max=44mR, RoHS=Yes, RoHS Compliant=Yes, Series=-, Stock 1=49175, Supplier 1=LCSC
Q2 Q4 Q5 Q12 Q13 Q14: "Trans MOSFET N-CH 30V 5.7A 3-Pin SOT-23", Case/Package=TO-236-3, Continuous Drain Current (ID)=5.7A, Drain to Source Voltage (Vdss)=30V, Gate to Source Voltage (Vgs)=12V, Input Capacitance=630pF, Manufacturer="Alpha & Omega Semiconductor", Manufacturer Part Number=AO3400A, Max Operating Temperature=150°C, Max Power Dissipation=1.4W, Min Operating Temperature=-55°C, Category=MOSFETs, ComponentLink1Description=https://datasheet.ciiva.com/940/ao3400a-940739.pdf?src-supplier=Digi-Key, ComponentLink1URL=https://datasheet.ciiva.com/940/ao3400a-940739.pdf?src-supplier=Digi-Key, ComponentLink2Description=https://datasheet.ciiva.com/26906/getdatasheetpartid-64438-26906526.pdf?src-supplier=Verical, ComponentLink2URL=https://datasheet.ciiva.com/26906/getdatasheetpartid-64438-26906526.pdf?src-supplier=Verical, ComponentLink3Description=https://datasheet.ciiva.com/940/ao3400a-940740.pdf?src-supplier=Digi-Key, ComponentLink3URL=https://datasheet.ciiva.com/940/ao3400a-940740.pdf?src-supplier=Digi-Key, ComponentLink4Description=https://datasheet.ciiva.com/940/ao3400a-940741.pdf?src-supplier=Digi-Key, ComponentLink4URL=https://datasheet.ciiva.com/940/ao3400a-940741.pdf?src-supplier=Digi-Key, Lead Free="Lead Free", Mount="Surface Mount", Number of Elements=1, Number of Pins=3, Packaging="Tape and Reel", Power Dissipation=1.4W, Pricing 1="10=0,07570, 50=0,06820, 250=0,06030, 1000=0,05410, 3000=0,05050 (EUR)", Radiation Hardening=No, Rds On Max=26.5mR, RoHS=Yes, RoHS Compliant=Yes, Series=-, Supplier 1=TME, Supplier Part Number 1=AO3400A
Q6 Q7 Q8 Q9: "MOSFET P-CH 30V 12A 8SOIC", Case/Package=SOIC, Continuous Drain Current (ID)=12A, Drain to Source Voltage (Vdss)=30V, Gate to Source Voltage (Vgs)=25V, Input Capacitance=2.6nF, Manufacturer="Alpha & Omega Semiconductor", Manufacturer Part Number=AO4407A, Max Operating Temperature=150°C, Max Power Dissipation=3.1W, Min Operating Temperature=-55°C, Category=MOSFETs, ComponentLink1Description=https://media.digikey.com/pdf/Data%20Sheets/Alpha%20&amp;%20Omega/AO4407_Doc..pdf?src-supplier=Digi-Key, ComponentLink1URL=https://media.digikey.com/pdf/Data%20Sheets/Alpha%20&amp;%20Omega/AO4407_Doc..pdf?src-supplier=Digi-Key, ComponentLink2Description=https://datasheet.ciiva.com/940/ao4407a-940836.pdf?src-supplier=Digi-Key, ComponentLink2URL=https://datasheet.ciiva.com/940/ao4407a-940836.pdf?src-supplier=Digi-Key, ComponentLink3Description=https://datasheet.ciiva.com/940/ao4407a-940838.pdf?src-supplier=Digi-Key, ComponentLink3URL=https://datasheet.ciiva.com/940/ao4407a-940838.pdf?src-supplier=Digi-Key, Lead Free="Lead Free", Mount="Surface Mount", Number of Elements=1, Number of Pins=8, Packaging="Tape and Reel", Power Dissipation=3.1W, Pricing 1="3000=0,93470, 6000=0,85170, 9000=0,75520, 15000=0,71280, 24000=0,62350, 30000=0,61730 (USD)", Radiation Hardening=No, Rds On Max=11mR, RoHS=Yes, RoHS Compliant=Yes, Series=-, Stock 1=3000, Supplier 1="Arrow Electronics", Supplier Part Number 1=AO4407A
Q10 Q11: "Trans Jfet N-ch 30V 3-PIN SOT-23 T/r", Breakdown Voltage=30V, Case/Package=SOT-23, Input Capacitance=14pF, Manufacturer="ON Semiconductor", Manufacturer Part Number=MMBF4393LT3G, Max Operating Temperature=150°C, Max Power Dissipation=225mW, Min Operating Temperature=-55°C, Package Quantity=10000, Supplier Part Number 1=MMBF4393LT3GOSCT-ND, Category=JFETs, ComponentLink1Description=https://datasheet.ciiva.com/961/mmbf4391lt1-d-961042.pdf?src-supplier=Avnet, ComponentLink1URL=https://datasheet.ciiva.com/961/mmbf4391lt1-d-961042.pdf?src-supplier=Avnet, ComponentLink2Description=https://datasheet.ciiva.com/961/mmbf4391lt1-d-961129.pdf?src-supplier=Digi-Key, ComponentLink2URL=https://datasheet.ciiva.com/961/mmbf4391lt1-d-961129.pdf?src-supplier=Digi-Key, Drain to Source Voltage (Vdss)=30V, Element Configuration=Single, Gate to Source Voltage (Vgs)=30V, Halogen Free="Halogen Free", Lead Free="Lead Free", Mount="Surface Mount", Number of Pins=3, Packaging="Tape and Reel", Polarity=N-CHANNEL, Power Dissipation=225mW, Pricing 1="1=0,41000, 10=0,33600, 100=0,22840, 500=0,17134, 1000=0,12850, 2000=0,11780, 5000=0,11065 (USD)", Reach SVHC Compliant=Yes, RoHS=Yes, RoHS Compliant=Yes, Series=-, Stock 1=422, Supplier 1=Digi-Key, Weight=0.00709oz
R1: library part "RES 0805 10K", "Res Thick Film 0805 10K Ohm 5% 1/8W ±200ppm/°C Molded SMD Paper T/R", Case/Package=SMD/SMT, Manufacturer="Vishay Semiconductors", Manufacturer Part Number=CRCW080510K0JNEAC, Max Operating Temperature=155°C, Min Operating Temperature=-55°C, Power Rating=125mW, Resistance=10kR, Resistor Type="Thick Film", Supplier Part Number 1=541-4163-1-ND, Temperature Coefficient=200ppm/°C, Tolerance=5%, Category=Resistors, ComponentLink1Description=http://www.vishay.com/docs/20035/dcrcwe3.pdf?src-supplier=Avnet+Asia, ComponentLink1URL=http://www.vishay.com/docs/20035/dcrcwe3.pdf?src-supplier=Avnet+Asia, ComponentLink2Description=http://www.vishay.com/docs/28773/crcwce3.pdf?src-supplier=Digi-Key, ComponentLink2URL=http://www.vishay.com/docs/28773/crcwce3.pdf?src-supplier=Digi-Key, Contact Plating=Tin, Lead Free="Lead Free", Length=2mm, Mount="Surface Mount", Pricing 1="1=0,10000, 10=0,03500, 100=0,01420, 1000=0,00636, 2500=0,00552 (USD)", RoHS=Yes, Stock 1=53351, Supplier 1=Digi-Key, Termination=Wraparound
R2: library part "RES 0805 100K", "RES SMD 100K OHM 5% 1/8W 0805", Case Code (Imperial)=0805, Case Code (Metric)=2012, Manufacturer=Vishay, Manufacturer Part Number=CRCW0805100KJNEAC, Max Operating Temperature=155°C, Max Power Dissipation=125mW, Min Operating Temperature=-55°C, Resistance=100kR, Resistor Type="Thick Film", Supplier Part Number 1=541-4164-1-ND, Temperature Coefficient=200ppm/°C, Tolerance=5%, Case/Package=0805, Category="Chip SMD Resistors", ComponentLink1Description=http://www.vishay.com/docs/28773/crcwce3.pdf?src-supplier=Digi-Key, ComponentLink1URL=http://www.vishay.com/docs/28773/crcwce3.pdf?src-supplier=Digi-Key, Number of Terminations=2, Packaging="Tape and Reel", Pricing 1="1=0,10000, 10=0,03500, 100=0,01420, 1000=0,00636, 2500=0,00552 (USD)", RoHS=No, Stock 1=93530, Supplier 1=Digi-Key
R3 R4 R5 R6 R7 R8 R9 R10 R11: library part "RES 0805 100", "Res Thick Film 0805 100 Ohm 5% 1/8W ±200ppm/°C Molded SMD Paper T/R", Case/Package=0805, Manufacturer="Vishay Semiconductors", Manufacturer Part Number=CRCW0805100RJNEAC, Power Rating=125mW, Resistance=100R, Supplier Part Number 1=541-4166-1-ND, Tolerance=5%, Category="Chip SMD Resistors", ComponentLink1Description=http://www.vishay.com/docs/28773/crcwce3.pdf?src-supplier=Digi-Key, ComponentLink1URL=http://www.vishay.com/docs/28773/crcwce3.pdf?src-supplier=Digi-Key, Lead Free="Lead Free", Pricing 1="1=0,10000, 10=0,03500, 100=0,01420, 1000=0,00636, 2500=0,00552 (USD)", RoHS=No, Stock 1=69770, Supplier 1=Digi-Key
R12 R13 R14 R15 R16 R30 R36 R39 R40: library part "RES 0805 1M", "Res Thick Film 0805 1M Ohm 5% 0.125W(1/8W) ±200ppm/°C Pad SMD T/R", Manufacturer=Vishay, Manufacturer Part Number=CRCW08051M00JNEAC, Supplier Part Number 1=71-CRCW08051M00JNEAC, Category="Chip SMD Resistors", Pricing 1="1=0,10000, 10=0,04000, 50=0,04000, 100=0,01700, 250=0,01600, 500=0,01500, 1000=0,00800, 2500=0,00700, 5000=0,00500, 10000=0,00500 (USD)", RoHS=No, Stock 1=183, Supplier 1=Mouser
R17 R18: library part "RES 0805 4K7", "Res Thick Film 0805 4.7K Ohm 5% 1/8W ±200ppm/°C Molded SMD Paper T/R", Case/Package=0805, Manufacturer=Vishay, Manufacturer Part Number=CRCW08054K70JNEAC, Power Rating=125mW, Resistance=4.7kR, Supplier Part Number 1=541-4165-1-ND, Tolerance=5%, Category=Resistors, ComponentLink1Description=http://www.vishay.com/docs/28773/crcwce3.pdf?src-supplier=Digi-Key, ComponentLink1URL=http://www.vishay.com/docs/28773/crcwce3.pdf?src-supplier=Digi-Key, ComponentLink2Description=http://datasheet.octopart.com/CRCW08054K70JNEAC-Vishay-datasheet-100063072.pdf?src-supplier=Future+Electronics, ComponentLink2URL=http://datasheet.octopart.com/CRCW08054K70JNEAC-Vishay-datasheet-100063072.pdf?src-supplier=Future+Electronics, Lead Free="Lead Free", Pricing 1="1=0,10000, 10=0,03500, 100=0,01420, 1000=0,00636, 2500=0,00552 (USD)", Stock 1=76524, Supplier 1=Digi-Key
R19 R22 R25 R28: library part "RES 0805 22K", "CRCW Series 0805 0.125 W 22 KOhm ±5 % ±200 ppm/K SMT Thick Film Chip Resistor", Manufacturer=Vishay, Manufacturer Part Number=CRCW080522K0JNEAC, Supplier Part Number 1=59AC3958, ComponentLink1Description=http://datasheet.octopart.com/CRCW080522K0JNEAC-Vishay-datasheet-100063072.pdf?src-supplier=Future+Electronics, ComponentLink1URL=http://datasheet.octopart.com/CRCW080522K0JNEAC-Vishay-datasheet-100063072.pdf?src-supplier=Future+Electronics, Supplier 1=Newark
R20 R21 R23 R24 R26 R27: library part "RES 0805 120", "Res 120 Ohm 5% 1/8W 0805", Manufacturer=Vishay, Manufacturer Part Number=CRCW0805120RJNEAC, Pricing 1="60000=0,00353 (USD)", Supplier 1=TTI, Supplier Part Number 1=CRCW0805120RJNEAC
R29: library part "RES TH 120 1W", "Ultra Miniature Style Metal Film Resistor 120Ohm 1W 5% Axial T/R", Case/Package=Axial, Manufacturer=Yageo, Manufacturer Part Number=FMP100JR-52-120R, Max Operating Temperature=155°C, Max Power Dissipation=1W, Min Operating Temperature=-55°C, Package Quantity=1, Resistance=120R, Resistor Type="Metal Film", Tolerance=5%, Category="Through-Hole Resistors", ComponentLink1Description=https://datasheet.ciiva.com/2710/yageolr-fmp-2013-2710614.pdf?src-supplier=Digi-Key, ComponentLink1URL=https://datasheet.ciiva.com/2710/yageolr-fmp-2013-2710614.pdf?src-supplier=Digi-Key, ComponentLink2Description=https://datasheet.ciiva.com/2710/yageolr-fmp-2013-2710613.pdf?src-supplier=Digi-Key, ComponentLink2URL=https://datasheet.ciiva.com/2710/yageolr-fmp-2013-2710613.pdf?src-supplier=Digi-Key, Lead Free="Lead Free", Length=0.248inch, Number of Terminations=2, Packaging="Tape and Reel", Pricing 1="1=0,18070, 10=0,15020, 25=0,10430, 100=0,06410, 250=0,04920, 500=0,03870, 1000=0,02670, 3000=0,02540, 6000=0,02180, 15000=0,02010 (USD)", RoHS=Yes, RoHS Compliant=Yes, Series=FMP, Stock 1=18475, Supplier 1="Arrow Electronics", Supplier Part Number 1=FMP100JR-52-120R
R31 R32 R33: library part "RES 0805 680K", "Res Thick Film 0805 680K Ohm 5% 1/8W ±200ppm/°C Molded SMD SMD Paper T/R", Case Code (Imperial)=0805, Case Code (Metric)=2012, Manufacturer="Vishay Dale", Manufacturer Part Number=CRCW0805680KJNEA, Max Operating Temperature=155°C, Max Power Dissipation=125mW, Min Operating Temperature=-55°C, Package Quantity=1, Resistance=680kR, Resistance Tolerance=5%, Resistor Type="Thick Film", Supplier Part Number 1=541-680KACT-ND, Temperature Coefficient=200ppm/°C, Voltage Rating=150V, Case/Package=0805, Category="Chip SMD Resistors", ComponentLink1Description=https://datasheet.ciiva.com/2493/dcrcwe3-2493920.pdf?src-supplier=Digi-Key, ComponentLink1URL=https://datasheet.ciiva.com/2493/dcrcwe3-2493920.pdf?src-supplier=Digi-Key, ComponentLink2Description=https://datasheet.ciiva.com/2493/dcrcwe3-2493921.pdf?src-supplier=Digi-Key, ComponentLink2URL=https://datasheet.ciiva.com/2493/dcrcwe3-2493921.pdf?src-supplier=Digi-Key, ComponentLink3Description=https://datasheet.ciiva.com/5546/dcrcwe3-109170-5546277.pdf?src-supplier=Mouser, ComponentLink3URL=https://datasheet.ciiva.com/5546/dcrcwe3-109170-5546277.pdf?src-supplier=Mouser, ComponentLink4Description=https://datasheet.ciiva.com/8924/dcrcwe3-8924022.pdf?src-supplier=Avnet, ComponentLink4URL=https://datasheet.ciiva.com/8924/dcrcwe3-8924022.pdf?src-supplier=Avnet, ComponentLink5Description=https://datasheet.ciiva.com/2493/dcrcwe3-2493919.pdf?src-supplier=Digi-Key, ComponentLink5URL=https://datasheet.ciiva.com/2493/dcrcwe3-2493919.pdf?src-supplier=Digi-Key, Construction=Rectangular, Contact Plating=Tin, Depth=1.25mm, Features="Automotive AEC-Q200", Height=0.02inch, Lead Free="Lead Free", Length=2mm, Military Standard=Not, Number of Pins=2, Number of Terminations=2, Packaging="Tape and Reel", Power Rating=125mW, Pricing 1="1=0,10000, 10=0,04800, 100=0,01950, 1000=0,00874, 2500=0,00759 (USD)", Radiation Hardening=No, REACH SVHC=Unknown, RoHS=Yes, RoHS Compliant=Yes, Series=CRCW, Size Code=0805, Stock 1=65, Supplier 1=Digi-Key, Tolerance=5%, Voltage Rating (DC)=150V, Weight=0.000194oz, Width=0.049inch
R34 R35: library part "RES 0805 270K", "Res Thick Film 0805 270K Ohm 5% 1/8W ±200ppm/°C Molded SMD SMD Paper T/R", Case Code (Imperial)=0805, Case Code (Metric)=2012, Manufacturer="Vishay Dale", Manufacturer Part Number=CRCW0805270KJNEA, Max Operating Temperature=155°C, Max Power Dissipation=125mW, Min Operating Temperature=-55°C, Package Quantity=1, Resistance=270kR, Resistance Tolerance=5%, Resistor Type="Thick Film", Temperature Coefficient=200ppm/°C, Voltage Rating=150V, Case/Package=0805, Category="Chip SMD Resistors", ComponentLink1Description=https://datasheet.ciiva.com/2493/dcrcwe3-2493829.pdf?src-supplier=Digi-Key, ComponentLink1URL=https://datasheet.ciiva.com/2493/dcrcwe3-2493829.pdf?src-supplier=Digi-Key, ComponentLink2Description=https://datasheet.ciiva.com/2493/dcrcwe3-2493830.pdf?src-supplier=Digi-Key, ComponentLink2URL=https://datasheet.ciiva.com/2493/dcrcwe3-2493830.pdf?src-supplier=Digi-Key, ComponentLink3Description=https://datasheet.ciiva.com/2493/dcrcwe3-2493831.pdf?src-supplier=Digi-Key, ComponentLink3URL=https://datasheet.ciiva.com/2493/dcrcwe3-2493831.pdf?src-supplier=Digi-Key, ComponentLink4Description=https://datasheet.ciiva.com/3258/dcrcwe3-3258391.pdf?src-supplier=Avnet, ComponentLink4URL=https://datasheet.ciiva.com/3258/dcrcwe3-3258391.pdf?src-supplier=Avnet, ComponentLink5Description=https://datasheet.ciiva.com/5549/dcrcwe3-109170-5549770.pdf?src-supplier=Mouser, ComponentLink5URL=https://datasheet.ciiva.com/5549/dcrcwe3-109170-5549770.pdf?src-supplier=Mouser, ComponentLink6Description=https://datasheet.ciiva.com/16500/dcrcwe3-16500506.pdf?src-supplier=Future+Electronics, ComponentLink6URL=https://datasheet.ciiva.com/16500/dcrcwe3-16500506.pdf?src-supplier=Future+Electronics, Construction=Rectangular, Contact Plating=Tin, Depth=1.25mm, Features="Automotive AEC-Q200", Height=0.02inch, Lead Free="Lead Free", Length=2mm, Military Standard=Not, Number of Pins=2, Number of Terminations=2, Packaging="Tape and Reel", Power Rating=125mW, Pricing 1="1=0,04400 (USD)", Radiation Hardening=No, REACH SVHC=Unknown, RoHS=Yes, RoHS Compliant=Yes, Series=CRCW, Size Code=0805, Stock 1=4, Supplier 1="Arrow Electronics", Supplier Part Number 1=CRCW0805270KJNEA, Termination=SMD/SMT, Tolerance=5%, Voltage Rating (DC)=150V, Weight=0.000194oz, Width=0.049inch